# Altium PCB eBox_3G.PcbDoc
Units mil, origin at the board's own origin, x right, y up, seen from the top; angles counter-clockwise.
Board outline 1870 x 1635 mil, 2 copper layers (Top Layer, Bottom Layer), stack 50.044 mil thick; 79 components, 47 nets, 280 pads, 161 vias.
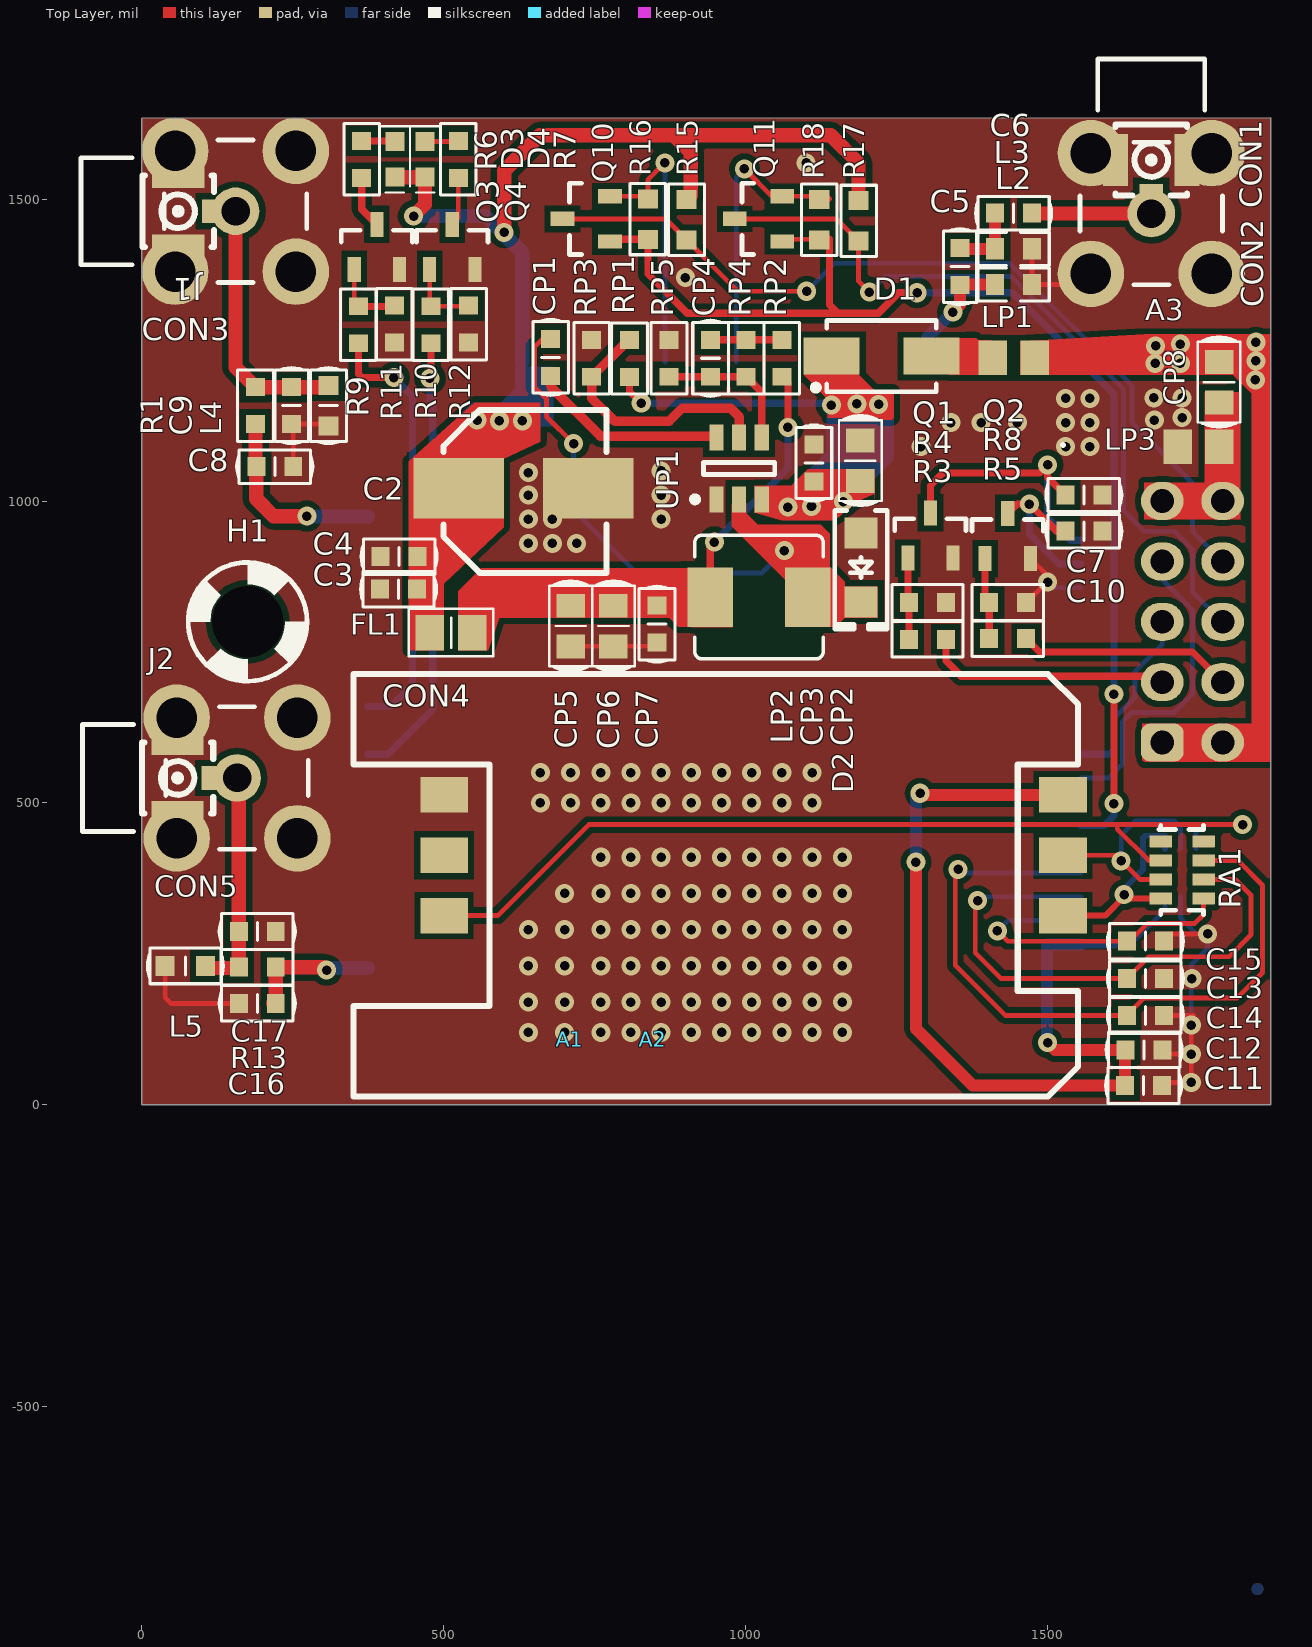
[diagram p0: Top Layer view]
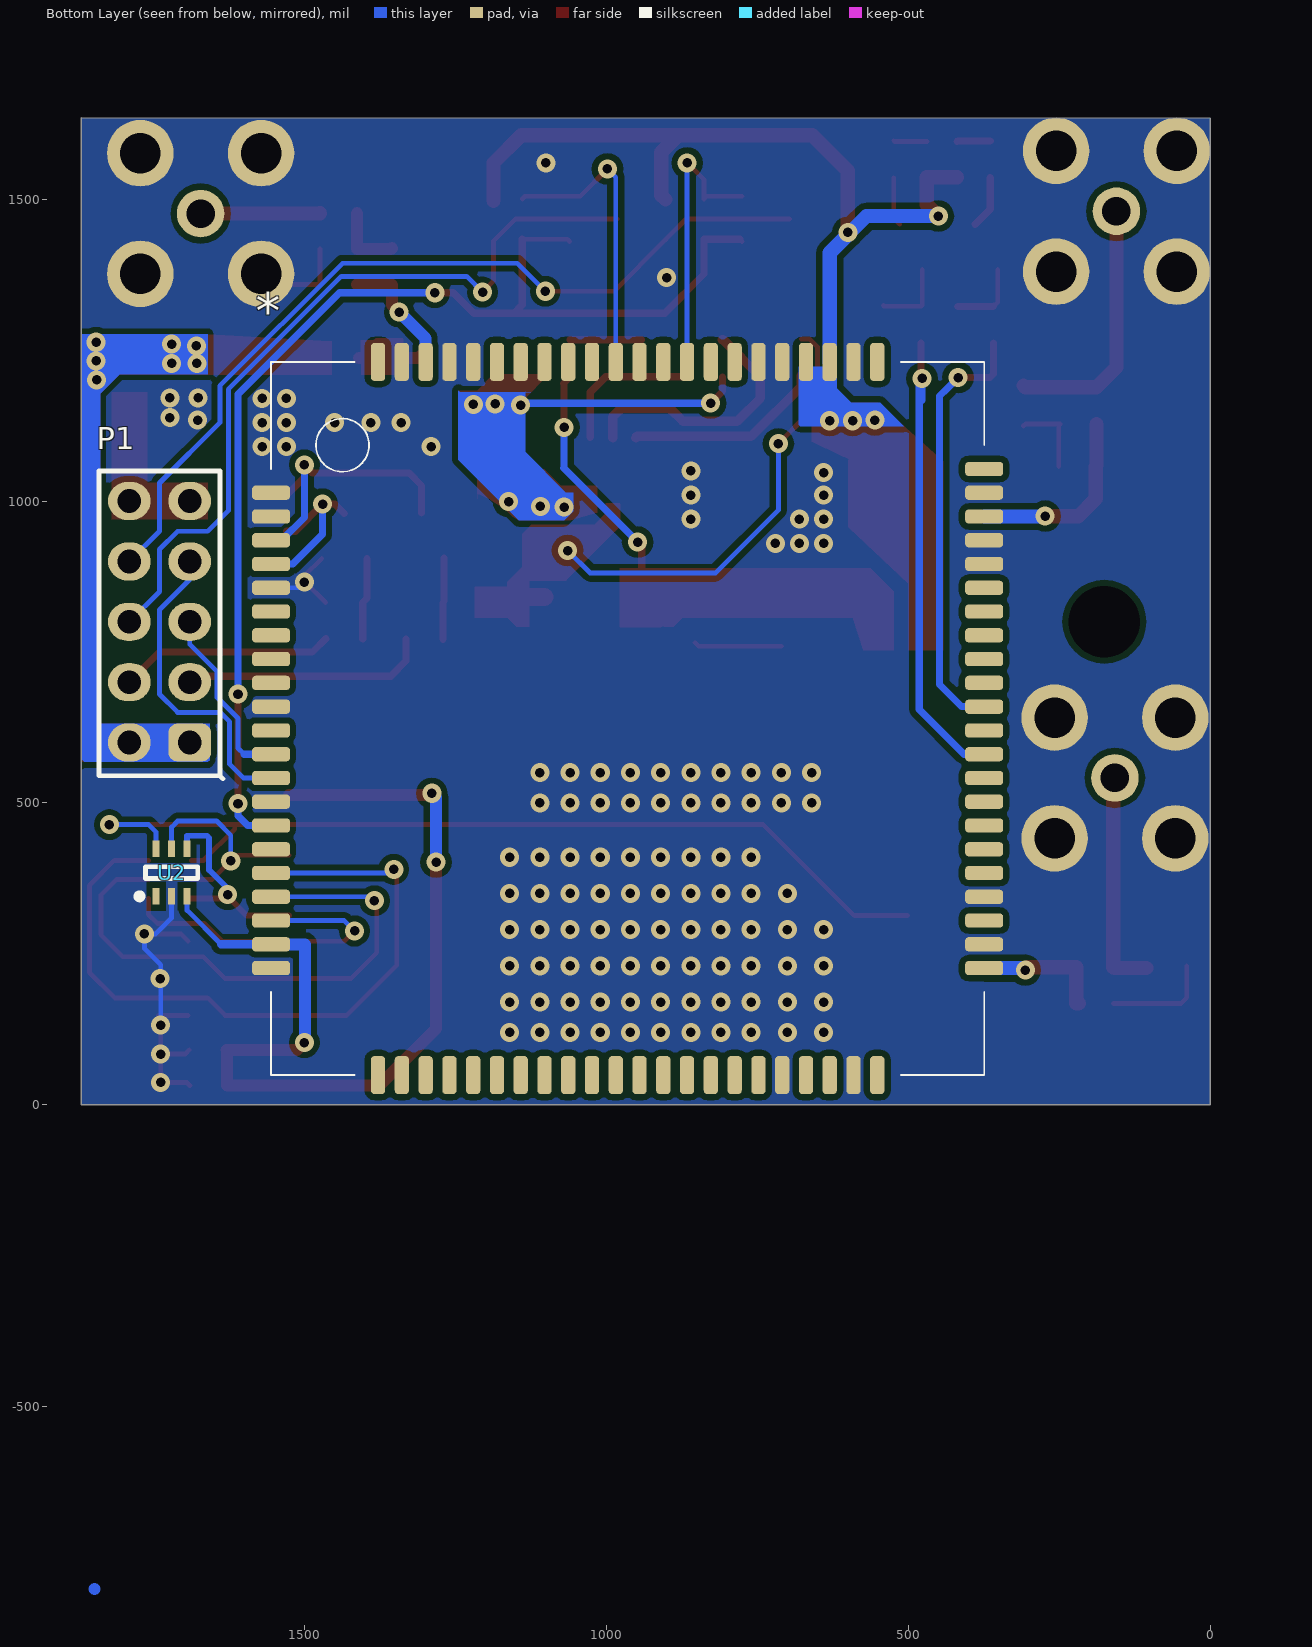
[diagram p1: Bottom Layer view, seen from below]

## Layer stack, top to bottom
Top Solder: solder mask 0.4, Solder Resist, Dk 3.5
Top Layer: signal copper 1.4
Dielectric 1: dielectric 47.2441, FR-4, Dk 4.8
Bottom Layer: signal copper 1.4
Bottom Solder: solder mask 0.4, Solder Resist, Dk 3.5

## Board outline
0,0 0,1633.86 1870,1635 1870,0

## Design rules (kind name [scope] priority, off if disabled: settings)
Clearance Clearance_1 [InPolygon] p1: gap=10
Clearance [All] p2: gap=6
ComponentClearance ComponentClearance_1 [InComponent('F1') or InComponent('A1') or InComponent('A2') or InComponent('TX1')] p1: gap=0 collisioncheckmode=3 verticalgap=0 showdistances=FALSE
ComponentClearance [All] p2: gap=10 collisioncheckmode=3 verticalgap=10 showdistances=FALSE
PolygonConnect PolygonConnect_2 [InNet('GND')] p1: connectstyle=Direct reliefconductorwidth=10 reliefentries=4 polygonreliefangle="90 Angle" airgapwidth=10
PolygonConnect PolygonConnect_1 [IsVia] p2: connectstyle=Direct reliefconductorwidth=10 reliefentries=4 polygonreliefangle="90 Angle" airgapwidth=10
PolygonConnect [All] p3: connectstyle=Relief reliefconductorwidth=15 reliefentries=4 polygonreliefangle="90 Angle" airgapwidth=25
RoutingVias [All] p1: holewidth=15.75 width=31.5 viastyle="Through Hole" minholewidth=11.81 minwidth=15.75 maxholewidth=196.85 maxwidth=393.7
SolderMaskExpansion [All] p1: expansion=4
Width [All] p1: maxlimit=40 minlimit=8 preferedwidth=8
29 further rules are at their usual default settings.

## Components (designator, comment, footprint, x,y, rotation, side; value= is the part's Value field where it differs from the comment)
* "Sim7600" Sim7600 944.88,698.82 r180 bottom
A1 "AUX antenna" Antenna 708.66,108.27 r0 top
A2 "GSM Antenna" Antenna 846.46,108.27 r0 top
A3 "GPS Antenna" Antenna 4468.29,538.73 r0 top
C2 "220uF" "C SMD ALU (D8)" 632,1021 r0 top
C3 "33pF" "CC 0603" 425,854 r0 top
C4 "10pF" "CC 0603" 426,908 r0 top
C5 "33pF" "CC 0603" 1355.16,1388.11 r270 top
C6 "33pF" "CC 0603" 1443.74,1476.69 r180 top
C7 "100nF" "CC 0603" 1560,1010 r0 top
C8 "N/A" "CC 0603" 220,1057 r180 top
C9 "N/A" "CC 0603" 248,1158 r90 top
C10 "100nF" "CC 0603" 1560,950 r0 top
C11 "33pF" "CC 0603" 1659,32 r0 top
C12 "100nF" "CC 0603" 1660,91 r0 top
C13 "22pF" "CC 0603" 1662,209 r0 top
C14 "22pF" "CC 0603" 1662,148 r0 top
C15 "22pF" "CC 0603" 1662,271 r0 top
C16 "N/A" "CC 0603" 191,168 r0 top
C17 "N/A" "CC 0603" 191,287 r180 top
CON1 "IPX" CONN/IPX/SMD 1671.81,1564.8 r270 top
CON2 "SMA" CONN/SMA/RA 1671.81,1476.22 r270 top
CON3 "SMA" CONN/SMA/RA 155,1480 r0 top locked
CON4 "SIM Holder" "CON SIM Holder C707" 1525.59,513.39 r180 top
CON5 "SMA" CONN/SMA/RA 157.48,541.34 r0 top
CP1 "0.1uF" "CC 0603" 677,1238 r90 top
CP2 "10uF" "CC 0805" 1190,1067 r90 top
CP3 "0.1uF" "CC 0603" 1113,1063 r90 top
CP4 "75pF" "CC 0603" 941.85,1236.5 r270 top
CP5 "22uF" "CC 0805" 710,793 r270 top
CP6 "22uF" "CC 0805" 781,793 r270 top
CP7 "0.1uF" "CC 0603" 853,796 r270 top
CP8 "1uF" "CC 0805" 1784,1197 r270 top
D1 "Diode" "DO-214AC (SMA) L" 1225,1240 r180 top
D2 "MBR360" "SMF DO-219AB" 1191,890 r270 top
D3 "LED GREEN" "Led 0603 - green" 419,1566 r90 top
D4 "LED RED" "Led 0603 - red" 469,1566 r90 top
FL1 "BLM21PG300SN1D" "L 0805 (2012)" 512,782 r180 top
H1 "Screw Hole" SCREW/2.8M/5M 175.04,800 r0 top
J1 "IPEX" CONN/IPX/SMD 60,1480 r0 top
J2 "IPEX" CONN/IPX/SMD 59.06,541.34 r0 top
L2 "N/A" "LL 0603" 1443.74,1358.58 r180 top
L3 "N/A" "LL 0603" 1443.74,1417.64 r180 top
L4 "LXES15AAA1-153" "C 0603" 309,1158 r90 top
L5 "LXES15AAA1-153" "C 0603" 72,230 r0 top
LP1 "4.7uH" 0805 1444,1237 r180 top
LP2 "10uH" IND_MWSA0518_525418 1022,841 r180 top
LP3 "4.7uH" 0805 1750,1090 r180 top
P1 "Header 5X2" HDR/Header/10/DL 1740,800 r90 bottom
Q1 "MMBT3904LT1G" SOT-23#1 1306,943 r90 top
Q2 "MMBT3904LT1G" SOT-23#1 1434,942 r90 top
Q3 "MMBT3904LT1G" SOT-23#1 389,1421 r90 top
Q4 "MMBT3904LT1G" SOT-23#1 514,1421 r90 top
Q10 "LN2302LT1G" SOT-23#2 735.91,1467.39 r180 top
Q11 "LN2302LT1G" SOT-23#2 1021.34,1467.39 r180 top
R1 "0R" "RR 0603" 188,1158 r270 top
R3 "4.7k" "RR 0603" 1301,771 r180 top
R4 "47k" "RR 0603" 1301,832 r0 top
R5 "4.7k" "RR 0603" 1434,772 r180 top
R6 "330R" "RR 0603" 364,1566 r90 top
R7 "330R" "RR 0603" 524,1566 r90 top
R8 "47k" "RR 0603" 1434,832 r0 top
R9 "4.7k" "RR 0603" 358.53,1292 r90 top
R10 "4.7k" "RR 0603" 478.53,1292 r90 top
R11 "47k" "RR 0603" 418,1293 r270 top
R12 "47k" "RR 0603" 541,1293 r270 top
R13 "0R" "RR 0603" 191,228 r0 top
R15 "10K/NA" "R 0603" 902,1466 r90 top
R16 "10K" "R 0603" 838,1467 r270 top
R17 "10K/NA" "R 0603" 1187,1464 r90 top
R18 "10K" "R 0603" 1122,1466 r270 top
RA1 "22R" "RAx4 1206 (3216)" 1723,389 r0 top
RP1 "510k" "RR 0603" 807.6,1236.18 r270 top
RP2 "49.9R" "RR 0603" 1059.96,1236.5 r90 top
RP3 "NC/105k" "RR 0603" 745,1236.5 r270 top
RP4 "100.0k" "RR 0603" 1000.91,1236.5 r270 top
RP5 "17.4K" "RR 0603" 872.95,1236.5 r90 top
U2 "SMF05CT1G" SOT-363-6 1720,384.63 r90 bottom
UP1 "TPS54302DDC" SOT-23-6 989,1054 r90 top

## Footprints (in the part's own frame and the unit in brackets; to place one, negate y for a bottom-side part, rotate by r counter-clockwise, add the part's x,y. Pads: shape width x height; smd on the part's side, far side on the other; paste and mask are expansions set on the pad)
0805 [mm]
  rect 1.2x1.45 smd: 1(-0.875,0) 2(0.875,0)
  body extent -1.07,-0.7 1.08,0.7, height 0.65
Antenna [mil]
"C 0603" [mm] "Chip Capacitor, 2-Leads, Body 1.6x0.8mm, IPC Medium Density"
  rect 0.8x0.85 smd: 1(-0.85,0) 2(0.85,0)
  silkscreen extent -1.6,-0.75 1.6,0.75, body extent -0.8,-0.43 0.8,0.43, height 0.81
"C SMD ALU (D8)" [mil] "SMD Aluminum Electrolytic Capacitor, size D8 (6.3 x 7.7 mm)"
  rect 150x100 smd: 1(-107.5,0) 2(107.5,0)
  silkscreen extent -132,-140 138,130, body extent -138,-135 138,125, height 303
"CC 0603" [mm] "Chip Capacitor, 2-Leads, Body 1.6x0.8mm, IPC Medium Density"
  rect 0.756x0.8 smd: 1(-0.778,0) 2(0.778,0)
  silkscreen extent -1.6,-0.75 1.6,0.75, body extent -0.8,-0.43 0.8,0.43, height 0.81
"CC 0805" [mm] "Chip Capacitor, 2-Leads, Body 2.0x1.3mm, IPC Medium Density"
  rect 1.006x1.2 smd: 1(-0.853,0) 2(0.853,0)
  silkscreen extent -1.9,-0.9 1.9,0.9, body extent -1,-0.64 1,0.61, height 0.6
"CON SIM Holder C707" [mm] "SIM Holder,  6 pins"
  rect 2x1.5 smd: 1(0,0) 2(0,2.54) 3(0,5.08) 5(26.035,0) 6(26.035,2.54) 7(26.035,5.08)
  silkscreen extent -0.64,-5.08 29.85,12.7, body extent -0.4,-4.85 29.6,12.45, height 2.5
CONN/IPX/SMD [mm]
  rect 1x1 smd: 1(1.5,0)
  rect 2.2x1.05 smd: 2(0,1.5) 3(0,-1.5)
  silkscreen extent -1.5,-1.5 1.5,1.5, body extent -1.3,-1.5 1.55,1.5, height 1.25
CONN/SMA/RA [mm] "Connector; RF Coaxial, MCX, Thru-Hole; 5 Position; Right Angle"
  round 2 hole 1.2: 1(0,0)
  round 2.8 hole 1.7: 2(-2.54,-2.54) 3(2.54,-2.54) 4(2.54,2.54) 5(-2.54,2.54)
  silkscreen extent -6.5,-3 3,3, body extent -6.5,-3 3,3, height 5.9
"DO-214AC (SMA) L" [mm] "Molded Diode, 2-Leads, Body 4.3x2.7mm, IPC Medium Density"
  rect 2.35x1.55 smd: 1(-2.1,0) 2(2.1,0)
  silkscreen extent -2.3,-1.5 2.89,1.5, body extent -2.6,-1.3 2.6,1.3, height 2.4
HDR/Header/10/DL [mm]
  rrect50% 1.6x1.8 hole 1: 1(-5.08,-1.27)
  oval 1.6x1.8 hole 1: 2(-5.08,1.27) 3(-2.54,-1.27) 4(-2.54,1.27) 5(0,-1.27) 6(0,1.27) 7(2.54,-1.27) 8(2.54,1.27) 9(5.08,-1.27) 10(5.08,1.27)
  silkscreen extent -6.6,-2.67 6.35,2.54, body extent -6.35,-2.54 6.35,2.54, height 8.89
IND_MWSA0518_525418 [mm]
  rect 1.9x2.5 smd paste+0 mask+0: 1(-2.05,0) 2(2.05,0)
  Top Layer pour cut-out: -2.7,2.6 2.7,2.6 2.7,-2.6 -2.7,-2.6
  silkscreen extent -2.7,-2.6 2.7,2.6, body extent -2.7,-2.6 2.7,2.6, height 1.8
"L 0805 (2012)" [mm] "Chip Capacitor, 2-Leads, Body 2.0x1.3mm, IPC Medium Density"
  rect 1.2x1.5 smd: 1(-0.9,0) 2(0.9,0)
  silkscreen extent -1.78,-1 1.78,1, body extent -1,-0.6 1,0.6, height 0.95
"Led 0603 - green" [mm] "Led SMD 0603"
  rect 0.8x0.8 smd: 1(-0.75,0) 2(0.75,0)
  silkscreen extent -1.4,-0.64 1.4,0.64, body extent -0.81,-0.4 0.81,0.4, height 0.6
"Led 0603 - red" [mm] "Led SMD 0603"
  rect 0.8x0.8 smd: 1(-0.75,0) 2(0.75,0)
  silkscreen extent -1.4,-0.64 1.4,0.64, body extent -0.81,-0.4 0.81,0.4, height 0.6
"LL 0603" [mm] "Chip Capacitor, 2-Leads, Body 1.6x0.8mm, IPC Medium Density"
  rect 0.756x0.9 smd: 1(-0.778,0) 2(0.778,0)
  silkscreen extent -1.5,-0.7 1.5,0.7, body extent -0.8,-0.48 0.8,0.47, height 0.8
"R 0603" [mm] "Chip Resistor, 2-Leads, Body 1.6x0.8mm, IPC Medium Density"
  rect 0.8x0.85 smd: 1(-0.85,0) 2(0.85,0)
  silkscreen extent -1.5,-0.75 1.5,0.75, body extent -0.8,-0.4 0.8,0.4, height 0.5
"RAx4 1206 (3216)" [mm] "Resistor Array x4 1206 (4D03)"
  rrect10% 0.95x0.5 smd: 1(-0.9,1.2) 2(-0.9,0.4) 3(-0.9,-0.4) 4(-0.9,-1.2) 5(0.9,-1.2) 6(0.9,-0.4) 7(0.9,0.4) 8(0.9,1.2)
  silkscreen extent -0.99,-1.88 0.9,1.88, body extent -0.8,-1.6 0.8,1.6, height 0.5
"RR 0603" [mm] "Chip Resistor, 2-Leads, Body 1.6x0.8mm, IPC Medium Density"
  rect 0.756x0.8 smd: 1(-0.778,0) 2(0.778,0)
  silkscreen extent -1.5,-0.75 1.5,0.75, body extent -0.8,-0.4 0.8,0.4, height 0.5
SCREW/2.8M/5M [mm]
  round 0 hole 3 unplated: 1(0,0)
  silkscreen extent -2.5,-2.5 2.5,2.5
Sim7600 [mm] "Sim7600 4G"
  rrect50% 1.6x0.6 smd: 1(-15.5,8) 2(-15.5,7) 3(-15.5,6) 4(-15.5,5) 5(-15.5,4) 6(-15.5,3) 7(-15.5,2) 8(-15.5,1) 9(-15.5,0) 10(-15.5,-1) 11(-15.5,-2) 12(-15.5,-3) 13(-15.5,-4) 14(-15.5,-5) 15(-15.5,-6) 16(-15.5,-7) 17(-15.5,-8) 18(-15.5,-9) 19(-15.5,-10) 20(-15.5,-11) 41(14.5,-11) 42(14.5,-10) 43(14.5,-9) 44(14.5,-8) 45(14.5,-7) 46(14.5,-6) 47(14.5,-5) 48(14.5,-4) 49(14.5,-3) 50(14.5,-2) 51(14.5,-1) 52(14.5,0) 53(14.5,1) 54(14.5,2) 55(14.5,3) 56(14.5,4) 57(14.5,5) 58(14.5,6) 59(14.5,7) 60(14.5,8) 81(-15.5,-12) 82(14.5,-12) 85(14.5,9)
  rrect50% 0.6x1.6 smd: 21(-10,-16.5) 22(-9,-16.5) 23(-8,-16.5) 24(-7,-16.5) 25(-6,-16.5) 26(-5,-16.5) 27(-4,-16.5) 28(-3,-16.5) 29(-2,-16.5) 30(-1,-16.5) 31(0,-16.5) 32(1,-16.5) 33(2,-16.5) 34(3,-16.5) 35(4,-16.5) 36(5,-16.5) 37(6,-16.5) 38(7,-16.5) 39(8,-16.5) 40(9,-16.5) 61(9,13.5) 62(8,13.5) 63(7,13.5) 64(6,13.5) 65(5,13.5) 66(4,13.5) 67(3,13.5) 68(2,13.5) 69(1,13.5) 70(0,13.5) 71(-1,13.5) 72(-2,13.5) 73(-3,13.5) 74(-4,13.5) 75(-5,13.5) 76(-6,13.5) 77(-7,13.5) 78(-8,13.5) 79(-9,13.5) 80(-10,13.5) 83(10,-16.5) 84(-11,-16.5) 86(-11,13.5) 87(10,13.5)
  silkscreen extent -15.5,-16.5 14.5,13.5
"SMF DO-219AB" [mm] "Molded Diode, 2-Leads, Body 3.90x1.90mm, IPC Medium Density"
  rect 1.3x1.4 smd: 1(-1.45,0) 2(1.45,0)
  silkscreen extent -2.4,-1.1 2.59,1.1, body extent -1.5,-0.9 1.5,0.9, height 1.18
SOT-23#1 [mm] "SOT23, 3-Leads, Body 3.0x2.5mm (max), Pitch 0.95mm, IPC Medium Density"
  rect 1.05x0.55 smd: 1(-0.95,0.95) 2(-0.95,-0.95) 3(0.95,0)
  silkscreen extent 0.2,-1.5 0.7,1.5, body extent -1.28,-1.46 1.27,1.46, height 0.95
SOT-23#2 [mm] "SOT23, 3-Leads, Body 3.0x2.5mm (max), Pitch 0.95mm, IPC Medium Density"
  rect 1x0.6 smd: 1(-1,0.95) 2(-1,-0.95) 3(1,0)
  silkscreen extent 0.2,-1.5 0.7,1.5, body extent -1.28,-1.46 1.27,1.46, height 0.95
SOT-23-6 [mm] "SOT23, 6-Leads, Body 3.0x3.0mm (max), Pitch 0.95mm, IPC Medium Density"
  rect 1.1x0.6 smd: 1(-1.3,0.95) 2(-1.3,0) 3(-1.3,-0.95) 4(1.3,-0.95) 5(1.3,0) 6(1.3,0.95)
  silkscreen extent -1.42,-1.5 0.25,1.97, body extent -1.27,-1.4 1.16,1.4, height 1.09
SOT-363-6 [mm] "SOT363 (SC-88, SC-70-6), 6-Leads, Body 2.2x2.2mm (max), Pitch 0.65mm, IPC Medium Density"
  rect 0.7x0.3 smd: 1(-1,0.65) 2(-1,0) 3(-1,-0.65) 4(1,-0.65) 5(1,0) 6(1,0.65)
  silkscreen extent -1.12,-1.1 0.25,1.48, body extent -1.15,-1.05 1.15,1.05, height 1

## Part data
A1 A2 A3: library part Antenna, "Antenna"
C2: library part Capacitor, "CAP TANT POLY 100UF 6.3V 1210"
C3 C5 C6 C11 C13 C14 C15: library part "Capacitor NP", "CAP CER 33PF 100V C0G/NP0 0603"
C4: library part "Capacitor NP", "CAP CER 10PF 100V C0G/NP0 0603"
C7 C10 C12 CP1 CP3 CP7: library part "Capacitor NP", "CAP CER 0.1UF 16V X7R 0603"
C8 C9 C16 C17: library part "Capacitor NP", "CAP N/A"
CON1: library part "CON IPX"
CON2 CON3 CON5: library part "CON SMA", "SMA connectors"
CON4: library part "SIM holder 6 pin", "SIM Card holder, 6 pins"
CP2 CP8: library part "Capacitor NP", "CAP CER 10UF 25V X5R 0805"
CP4: library part "Capacitor NP", "CAP CER 75PF 50V C0G/NP0 0603"
CP5 CP6: library part "Capacitor NP", "CAP CER 22UF 25V X5R 0805"
D1: "Default Diode"
D2: library part VTVS58ASMF-HM3-08, "TVS DIODE 57.6V 98V DO219AB"
D3: library part Led, "LED GREEN DIFFUSED 0603 SMD"
D4: library part Led, "LED RED DIFFUSED 0603 SMD"
FL1: "30 Ohms @ 100MHz 1 Power Line Ferrite Bead 0805 _2012 Metric_ 4A 14mOhm"
J1 J2: library part "CON IPX", "CONN UMC RCPT STR 50 OHM SMD"
L2 L3: library part Inductor, "IND N/A"
L4 L5: "Clamp Ipp Tvs Diode Surface Mount 1005"
LP1 LP3: library part Inductor
LP2: library part "Inductor Power", "Fixed Inductors 10uH 20% Low Profile"
P1: "Header, 5-Pin, Dual row"
Q1 Q2 Q3 Q4: "TRANS NPN 40V 0.2A SOT23"
Q10 Q11: library part "Mosfet N", "Mosfet N"
R1 R13: library part Resistors, "RES SMD 0 OHM JUMPER 1/10W 0603"
R3 R5 R9 R10: library part Resistors, "RES SMD 4.7K OHM 1% 1/10W 0603"
R4 R8 R11 R12: library part Resistors, "RES SMD 47K OHM 5% 1/10W 0603"
R6 R7: library part Resistors, "RES SMD 330 OHM 5% 1/10W 0603"
R15 R16 R17 R18: library part Resistor, "Resistor"
RA1: library part "Resistor Array x4"
RP1: library part Resistors, "RES SMD 510K OHM 1% 1/10W 0603"
RP2: library part Resistors, "RES SMD 49.9 OHM 1% 1/10W 0603"
RP3: library part Resistors, "RES SMD 105K OHM 1% 1/10W 0603"
RP4: library part Resistors, "RES SMD 100K OHM 1% 1/10W 0603"
RP5: library part Resistors, "RES SMD 17.4K OHM 1% 1/10W 0603"
U2: library part SMF05C, "TVS DIODE 5V 12.5V SC88"
UP1: library part TPS56339, "IC REG BUCK ADJ 3A TSOT23-6"

## Via types
v1: diameter 31.5, hole 15.75, Top Layer to Bottom Layer, tented both sides, 160 vias
v2: diameter 31.5/31.5 (per signal layer), hole 15.75, Top Layer to Bottom Layer, tented both sides, 1 vias

## Nets (pads, with @x,y where several pads share a name; then routed paths per layer and width w, separated by ;. In a path a pad name is that pad's centre, name@x,y a point inside that pad or via, vN(x,y) a via of type N, cw(c..) or ccw(c..) an arc to the next point about the centre after c; other vN are vias at no path point)
AUX_ANT: *.59 C8.2 R1.2 | length 321.1
  Top Layer w23.62: R1.2 188,1058.37 C8.2 189.37,1003.63 218,975 v1(273,975)
  Bottom Layer w23.62: v1(273,975) 273.59,974.41 *.59
GND: *.1 *.2 *.5 *.10 *.14 *.37 *.40 *.41 *.43 *.57 *.58 *.60 *.61 *.64 *.65 *.77 *.78 *.80 *.81 C2.2 C3.1 C4.1 C7.2 C8.1 C9.1 C10.2 C11.2 C12.2 C13.2 C14.2 C15.2 C16.1 C17.1 CON1.2 CON1.3 CON2.2 CON2.3 CON2.4 CON2.5 CON3.2 CON3.3 CON3.4 CON3.5 CON4.5 CON5.2 CON5.3 CON5.4 CON5.5 CP2.2 CP3.2 CP5.2 CP6.2 CP7.2 D2.1 J1.2 J1.3 J2.2 J2.3 L2.1 L3.1 L4.1 L5.1 LP3.2 Q1.2 Q2.2 Q3.2 Q4.2 R4.2 R8.2 R11.2 R12.2 RP3.1 RP5.2 U2.2 UP1.1 | length 1374.3
  Top Layer w8: L5.1 38.54,177.46 48,168 C16.1 ; C8.1 250.63,1124.74 C9.1 306.17,1127.37 L4.1 ; CP5.2 CP6.2 847.05,759.42 CP7.2 ; R8.2 1498.38,865.75 v1(1500,865.75) 1500,876 Q2.2 ; L3.1 L2.1 1554.17,1358.58 CON2.3 ; C11.2 1694.63,37 v1(1738,37) v1(1738,84) ; C12.2 1697.63,84 v1(1738,84) ; C14.2 1742,148 1738,144 v1(1738,132) v1(1738,84) ; C15.2 1704.63,283 v1(1765,283)
  Bottom Layer w8: v1(1500,865.75) 1509.45,856.3 *.5 ; U2.2 1720,309.53 1746.53,283 v1(1765,283) 1765,259 1738,232 v1(1738,132)
  other v1: 640,120 700,120 760,120 810,120 860,120 910,120 960,120 1010,120 1060,120 1110,120 1160,120 640,170 700,170 760,170 810,170 860,170 910,170 960,170 1010,170 1060,170 1110,170 1160,170 1739,209 640,230 700,230 760,230 810,230 860,230 910,230 960,230 1010,230 1060,230 1110,230 1160,230 640,290 700,290 760,290 810,290 860,290 910,290 960,290 1010,290 1060,290 1110,290 1160,290 700,350 760,350 810,350 860,350 910,350 960,350 1010,350 1060,350 1110,350 1160,350 760,410 810,410 860,410 910,410 960,410 1010,410 1060,410 1110,410 1160,410 660,500 710,500 760,500 810,500 860,500 910,500 960,500 1010,500 1060,500 1110,500 660,550 710,550 760,550 810,550 860,550 910,550 960,550 1010,550 1060,550 1110,550 640,930 680,930 720,930 640,970 680,970 860,970 640,1010 860,1010 640,1047 860,1050 1290,1090 1530,1090 1570,1090 1340,1130 1390,1130 1450,1130 1530,1130 1570,1130 1677,1134 1723,1138 1530,1170 1570,1170 1676,1171 1723,1171 900,1370 1100,1560
GNDI: CP8.2 LP3.1 P1.9 P1.10 | length 265.9
  Top Layer w20: P1.9 P1.10 1784.45,1005.55 LP3.1 ; LP3.1@1783.45,1090 1783.45,1162.87 CP8.2
GPS_ANT: *.79 C5.2 L2.2 | length 208.7
  Top Layer w20: v1(1343,1313) 1355.16,1325.16 C5.2 1356.26,1358.58 L2.2
  Bottom Layer w20: *.79 1299.21,1269.21 v1(1343,1313)
GSM_ATN: *.82 C16.2 R13.2 | length 216.4
  Top Layer w23.62: C16.2@217.63,168 C16.2@218,168.37 ; C16.2 R13.2 301,228 v1(306,223)
  Bottom Layer w23.62: v1(306,223) 309.38,226.38 *.82
NetC5_1: C5.1 C6.2 L3.2 | length 117.5
  Top Layer w20: C5.1 1356.26,1417.64 L3.2 C6.2
NetC6_1: C6.1 CON1.1 CON2.1 | length 197.6
  Top Layer w23.62: C6.1 1474.84,1476.22 CON2.1
NetC9_2: C9.2 CON3.1 J1.1 L4.2 R1.1 | length 427.2
  Top Layer w23.62: CON3.1 155,1221.63 R1.1 C9.2 306.17,1188.63 L4.2
NetC17_2: C17.2 CON5.1 J2.1 L5.2 R13.1 | length 377.4
  Top Layer w12: R13.1@155.2,226.46 R13.1@160.37,231.63
  Top Layer w23.62: L5.2@105.46,226.46 155.2,226.46 158.83,226.46 R13.1 160.37,231.63 C17.2 160.37,538.45 CON5.1
NetCON4_2: CON4.2 RA1.3 U2.5 | length 369
  Top Layer w8: CON4.2 1612.61,413.39 v1(1622,404) 1652.75,373.25 RA1.3
  Bottom Layer w8: v1(1622,404) 1622,446.5 1645.5,470 1710,470 1720,460 U2.5
NetCON4_3: CON4.3 RA1.4 U2.4 | length 342.8
  Top Layer w9.84: CON4.3 1595.39,313.39 1627,345 1630.24,341.76 RA1.4
  Bottom Layer w9.84: v1(1627,348) 1627,358.2 1657.92,389.12 1657.92,441.92 1661.64,445.64 1694.41,445.64 U2.4
NetCON4_7: CON4.7 RA1.2 U2.6 | length 1591.9
  Top Layer w8: CON4.7 589.39,313.39 740,464 v1(1823,464) ; 1615.5,460 1615.5,456.5 1667.25,404.75 RA1.2
  Bottom Layer w8: U2.6 1745.59,451.59 1758,464 v1(1823,464)
NetCP1_1: CP1.1 UP1.6 | length 327.1
  Top Layer w15.75: CP1.1 677,1190 759.5,1107.5 949.28,1107.5 UP1.6
NetCP1_2: CP1.2 D2.2 LP2.1 UP1.2 | length 828.6
  Top Layer w8: CP1.2 663.63,1268.63 650,1255 650,1189.6 670,1169.6 670,1140 v1(715,1095)
  Top Layer w30: LP2.1 1182.91,841 D2.2
  Bottom Layer w8: v1(715,1095) 715,985 819,881 1027,881 v1(1064,918)
NetCP4_1: CP4.1 RP2.2 RP4.1 | length 118.1
  Top Layer w12: CP4.1 RP4.1 RP2.2
NetCP4_2: CP4.2 RP4.2 RP5.1 UP1.4 | length 239.2
  Top Layer w12: RP5.1 CP4.2 RP4.2 1026.4,1180.37 UP1.4
NetCP5_1: CP5.1 CP6.1 CP7.1 FL1.1 LP2.2 RP2.1 | length 424
  Top Layer w11.81: LP2.2 941.29,925.29 v2(948,932) ; RP2.1 1071,1194.83 1070,1193.83 v1(1070,1122)
  Bottom Layer w11.81: v2(948,932) 1071,1055 1070,1056 v1(1070,1122)
NetD1_1: D1.1 LP1.2 | length 103.1
  Top Layer w20: D1.1 1310.68,1237 LP1.2
NetD3_2: D3.2 R6.2 | length 55.5
  Top Layer w11.81: R6.2 417.9,1596.63 D3.2
NetD4_2: D4.2 R7.2 | length 55.5
  Top Layer w8: D4.2 522.9,1595.53 R7.2
NetQ1_1: Q1.1 R3.2 R4.1 | length 135.3
  Top Layer w11.81: Q1.1 1268.6,833.77 R4.1 R3.2
NetQ2_1: Q2.1 R5.2 R8.1 | length 135.4
  Top Layer w11.81: Q2.1 1396.6,838.77 R8.1 R5.2
NetQ3_1: Q3.1 R9.2 R11.1 | length 123.6
  Top Layer w8: Q3.1 351.6,1329.56 R9.2
  Top Layer w11.81: R9.2 359.16,1322 R11.1@418,1322
NetQ3_3: Q3.3 R6.1 | length 87.3
  Top Layer w11.81: R6.1 364,1483.4 Q3.3
NetQ4_1: Q4.1 R10.2 R12.1 | length 124.7
  Top Layer w8: Q4.1 476.6,1324.56 R10.2 540,1322.63 R12.1
NetQ4_3: Q4.3 R7.1 | length 81.1
  Top Layer w8: Q4.3 524,1468.4 R7.1
NetRP1_1: RP1.1 RP3.2 UP1.5 | length 432.8
  Top Layer w15.75: RP1.1 805.95,1266.81 RP3.2 745,1170.13 782.75,1132.38 873.38,1132.38 895,1154 975,1154 989,1140 UP1.5
NETSTAT: *.51 R9.1 | length 722.6
  Top Layer w11.81: R9.1 358.53,1210.53 364.47,1204.58 v1(417.42,1204.58)
  Bottom Layer w11.81: *.51 411.45,659.45 448,696 448,1174 435.41,1186.59 v1(417.42,1204.58)
PWRKEY: *.3 C7.1 Q1.3 | length 473.8
  Top Layer w11.81: Q1.3 1306,1026 1326.16,1046.16 1486.16,1046.16 v1(1500,1060) 1500,1039.37 C7.1
  Bottom Layer w11.81: v1(1500,1060) 1500,972.84 1537.8,935.04 *.3
PWRSTAT: *.49 R10.1 | length 784
  Top Layer w11.81: v1(477,1203) 478.53,1204.53 R10.1
  Bottom Layer w11.81: *.49 407.71,580.71 481.63,654.63 481.63,1198.37 v1(477,1203) 477,1166.55
RESET: *.4 C10.1 Q2.3 | length 276
  Top Layer w12: Q2.3 1449.6,995 v1(1470,995) 1515,950 C10.1
  Bottom Layer w12: v1(1470,995) 1470,945 1519.33,895.67 *.4
RXD_L: *.68 Q10.2 R16.1 | length 465.4
  Top Layer w8: Q10.2 833.68,1504.79 R16.1 838,1532 v1(866,1560)
  Bottom Layer w8: v1(866,1560) 866.14,1559.86 *.68
SIM_PRESET: P1.4 R5.1 | length 355.2
  Top Layer w11.81: R5.1 1486.63,750 1740,750 P1.4
SIM_PWRKEY: P1.3 R3.1 | length 408.7
  Top Layer w11.81: R3.1 1331.63,735.37 1357.09,709.91 1680.09,709.91 P1.3
SIM_UART_RX: P1.8 Q10.3 R15.1 | length 1449.5
  Top Layer w8: Q10.3 867.15,1467.39 R15.1 987.04,1347.5 v1(1101,1347.5)
  Bottom Layer w8: v1(1101,1347.5) 1147.5,1394 1436.8,1394 1640,1190.8 1640,1129.91 1740,1029.91 1740,950 P1.8
SIM_UART_TX: P1.6 Q11.3 R17.1 | length 1303.7
  Top Layer w8: Q11.3 1150.15,1467.39 R17.1 1187,1364 v1(1205,1346)
  Bottom Layer w8: v1(1205,1346) 1231,1372 1439,1372 1626,1185 1626,984 1660,950 1710,950 1740,920 1740,850 P1.6
SIM_USB_DM: *.12 P1.5 | length 301.5
  Bottom Layer w8: 1600,580.71 1610,590.71 1610,640 1644.57,674.57 1644.57,717.19 1690,762.62 P1.5
  Bottom Layer w11.81: *.12 1600,580.71
SIM_USB_DP: *.13 P1.7 | length 524.2
  Bottom Layer w8: *.13 1601.34,541.34 1624,564 1624,634.2 1639.8,650 1710,650 1740,680 1740,820 1690,870 P1.7
TXD_L: *.71 Q11.2 R18.1 | length 486.9
  Top Layer w8: v1(998,1550) 1043.21,1504.79 Q11.2 1134.68,1504.79 1139,1500.46
  Bottom Layer w8: *.71 984.25,1536.25 v1(998,1550)
USIM_CLK: *.19 C15.1 RA1.5 | length 538.6
  Top Layer w8: v1(1417,288) 1434,271 C15.1 1636.39,271 1665.91,300.53 1743.78,300.53 1758.43,315.18 RA1.5
  Bottom Layer w8: v1(1417,288) 1434.12,305.12 *.19
USIM_DATA: *.17 C14.1 RA1.7 | length 1198.7
  Top Layer w8: v1@1347.09,385.09 1347.09,230.91 1430,148 C14.1 1660.37,177 1814,177 1856,219 1856,363.75 1815,404.75 RA1.7
  Top Layer w11.81: v1@1347.09,385.09 v1(1352,390)
  Bottom Layer w8: v1(1352,390) 1358.14,383.86 *.17
USIM_RST: *.18 C13.1 RA1.6 | length 921.3
  Top Layer w8: v1@1380.09,334.09 1380.09,251.91 1423,209 C13.1 1667.62,245.25 1800.75,245.25 1837,281.5 1837,347.25 1811,373.25 RA1.6
  Top Layer w11.81: v1@1380.09,334.09 v1(1384,338)
  Bottom Layer w8: v1(1384,338) 1390.49,344.49 *.18
V_1V8: *.15 Q10.1 Q11.1 R16.2 R18.2 | length 1972.2
  Top Layer w8: Q10.1 Q10.1@778.83,1433.54 ; Q11.1 1064.26,1433.54 1139,1433.54
  Top Layer w12: Q10.1@778.83,1433.54 R16.2 838,1376 903,1311 1153,1311 ; 1139,1433.54 1139,1325 1153,1311 ; v1(1284,1345) 1253.5,1345 1219.5,1311 1153,1311 ; v1(1610,498.8) v1(1610,680)
  Bottom Layer w12: v1(1284,1345) 1442,1345 1610,1177 v1(1610,680) ; *.15 1593.8,462.6 1610,478.8 v1(1610,498.8)
V_SIM: *.62 *.63 C2.1 C3.2 C4.2 D3.1 D4.1 FL1.2 R15.2 R17.2 | length 1424.4
  Top Layer w23.62: D3.1 D4.1 469,1491 v1(450,1472) ; v1(600,1445) 600,1547 659,1606 880.54,1606 ; R15.2 908.81,1506.28 908.81,1577.73 880.54,1606 ; R17.2 1187,1560 1141,1606 880.54,1606
  Bottom Layer w23.62: v1(450,1472) 569,1472 629.92,1411.08 *.62
  other v1: 592,1133 630,1133 555,1134
V_USIM: *.20 C11.1 C12.1 CON4.1 U2.3 | length 1615.1
  Top Layer w12: C12.1@1628.37,90 C12.1
  Top Layer w20: v1(1282,402) 1282,126 1376,32 C11.1 C12.1@1628.37,90 ; v1(1289,516) 1291.61,513.39 CON4.1 ; v1(1500,103) 1512,91 C12.1
  Bottom Layer w8: 1638.13,265.75 1694.41,322.02 U2.3
  Bottom Layer w13.78: *.20 1638.13,265.75
  Bottom Layer w20: v1(1282,402) 1282,509 v1(1289,516) ; v1(1500,103) 1498.75,104.25 1498.75,265.75 *.20
VIN: CP8.1 LP1.1 P1.1 P1.2 | length 1526.4
  Top Layer w20: CP8.1@1784,1235.58 CP8.1@1804.42,1235.58
  Top Layer w30: P1.1@1689,594.43 1834.43,594.43 1853,613 1853,1192 v1(1844.22,1200.78) ; CP8.1@1804.42,1235.58 v1@1841.72,1198.28
  Bottom Layer w30: P1.2 1840,600 1854,614 1854,1185.43 1819.43,1220
  other v1: 1678,1228 1720,1228 1845,1232 1679,1257 1720,1260 1845,1263
VIN1: CP2.1 CP3.1 D1.2 RP1.2 UP1.3 | length 703.9
  Top Layer w12: RP1.2 807.6,1181.4 v1(827,1162)
  Top Layer w20: D1.2 1142.32,1159.32 v1(1142,1159) 1151,1159 1152,1160 1153,1159 1155,1161 v1(1184,1161)
  Bottom Layer w12: v1(827,1162) 1136,1162 1142,1168 v1(1142,1159)
  Bottom Layer w30: v1(1109,991) 1184,1066 v1(1184,1161)
  other v1: 1070,990 1161.83,998.85 1220,1160
pads on no net: *.6 *.7 *.8 *.9 *.11 *.16 *.21 *.22 *.23 *.24 *.25 *.26 *.27 *.28 *.29 *.30 *.31 *.32 *.33 *.34 *.35 *.36 *.38 *.39 *.42 *.44 *.45 *.46 *.47 *.48 *.50 *.52 *.53 *.54 *.55 *.56 *.66 *.67 *.69 *.70 *.72 *.73 *.74 *.75 *.76 *.83 *.84 *.85 *.86 *.87 CON4.6 H1.1 RA1.1 RA1.8 U2.1
copper on no net: | length 0

## Polygon pours and split planes (outlines as drawn)
GND on Bottom Layer "GND" (solid, remove dead copper, pour order 0): 0,0 0,1633.86 1868.86,1633.86 1870,1635 1870,0 0,0
GND on Top Layer "GND" (solid, pour order 2): 0,0 0,1633.86 1868.86,1633.86 1870,1632.72 1870,0 0,0

## Other copper
Top Layer:
  region net NetCP1_2: 1218,858 1218,807 1164,807 1149,792 1128,792 1128,889 1127,890 1140,890 1164,866 1164,858
  region net V_SIM: 457,753 442,753 442,1066 550,1163 609,1163 660,1163 660,1098 598,1069 599,1068 599,957 500,863 500,808 500,753 475,753 463,753
  region net NetCP1_2: 977,995 977,958 1066,869 1066,868 1139,868 1139,946 1124,961 1020,961 1001,980 1001,996 978,996
  region net NetCP5_1: 904,792 888,792 873,807 863,807 592,807 574,753 553,753 546,753 524,753 524,785 524,851 526,853 562,889 978,889 978,791 909,791 907,793
  region net VIN1: 1097,1208 1136,1169 1136,1138 1221.36,1138 1225.43,1133.93 1226.5,1135 1243,1135 1245,1137 1245,1183 1214,1183 1186,1211 1185,1210 1096,1210
  region net VIN1: 1074,1025 1073,1023 1103,1053 1214,1053 1214,1004.07 1214,1012.35 1194.42,1004.07 1166.43,985.43 1155,974 1145,968.38 1107.44,968.38 1059,968.38 1015,981 1015,1025 1075,1025 1074,1024 1073,1023
  region net NetD1_1: 1407,1266 1386,1266 1382,1270 1337,1270 1336,1269 1336,1210 1337,1209 1406,1209
  region net VIN: 1457,1265 1660,1276 1870,1276 1870,1261 1870,1222 1870,1178 1840,1180 1838,1178 1807,1209 1459,1209 1455,1209 1455,1213 1455,1265
  region net GNDI: 1660,1030 1660,970 1820,970 1819.43,970.57 1819.43,1180 1760,1180 1760,1030
  region net VIN: 1657,631 1838,631 1839,632 1839,1179 1837,1179 1806,1210 1660,1210 1660,1276 1870,1276 1870,573 1870,568 1865,568 1660,568 1657,571
Bottom Layer:
  region net V_SIM: 507,1124 679,1124 681,1126 681,1222.3 618,1222.3 618,1187 594,1163 546,1163
  region net VIN1: 1125,1180 1242,1180 1245,1183 1245,1068 1145,968 1070,968 1055,983 1055,1014 1067,1014 1134.45,1081.45 1134.45,1180.94
  region net VIN: 1657,631 1838,631 1838,1178 1806,1210 1667,1210 1660,1210 1660,1217 1660,1276 1858,1276 1870,1276 1869,1261 1869,572 1865,568 1660,568 1657,571

## Silkscreen, mask and mechanical layers (free items; w line width, h text height)
Top Overlay:
  lines w10: 1525.59,1092.52 1525.59,1092.52
Mechanical 30:
  circle w5: c1446.85,950.98 r15.94
  circle w5: c1446.85,550.98 r15.94
  lines w5: 1421.85,525.98 1471.85,525.98 1471.85,975.98 1421.85,975.98 1421.85,525.98
  lines w10: 167.32,157.48 ccw(c206.69,157.48) 206.69,118.11 1545.28,118.11 ccw(c1545.28,157.48) 1584.65,157.48 1584.65,1496.06 ccw(c1545.28,1496.06) 1545.28,1535.43 206.69,1535.43 ccw(c206.69,1496.06) 167.32,1496.06 167.32,157.48